# Altium PCB Compressor.PcbDoc (part 2 of 2)
Units mm, origin at the board's own origin, x right, y up, seen from the top; angles counter-clockwise.
Board outline 111 x 68.75 mm, 2 copper layers (Top Layer, Bottom Layer), stack 1.57 mm thick; 59 components, 13 nets, 218 pads, 0 vias.
Unrouted connection lines stored in the file: 54.
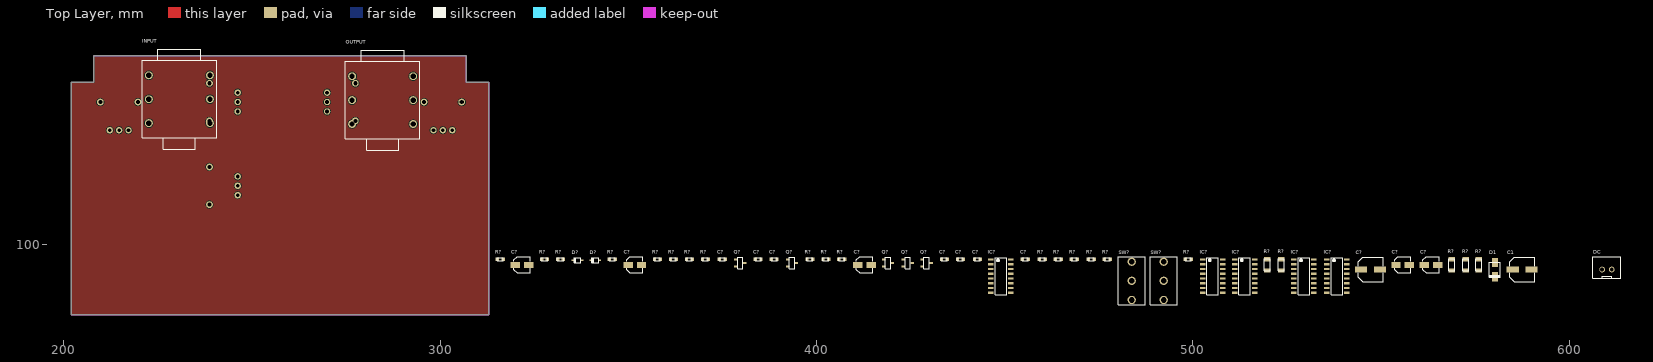
[diagram p0: Top Layer view]

## Part data (continued)
R?: library part CRCW06034M70FKEA, "RES SMD 4.7M OHM 1% 1/10W 0603", Case Code (Imperial)=0603, Case Code (Metric)=1608, Manufacturer=Vishay, Max Operating Temperature=155°C, Max Power Dissipation=100mW, Min Operating Temperature=-55°C, Package Quantity=10, Resistance=4.7MR, Supplier Part Number 1=2138688, Temperature Coefficient=100ppm/°C, Tolerance=1%, Voltage Rating=75V, Case/Package=0603, Category="Chip SMD Resistors", ComponentLink1Description=https://datasheet.ciiva.com/11812/0900766b80d98afc-11812356.pdf?src-supplier=RSComponents, ComponentLink1URL=https://datasheet.ciiva.com/11812/0900766b80d98afc-11812356.pdf?src-supplier=RSComponents, ComponentLink2Description=https://datasheet.ciiva.com/22706/1697337-22706246.pdf?src-supplier=Element14, ComponentLink2URL=https://datasheet.ciiva.com/22706/1697337-22706246.pdf?src-supplier=Element14, ComponentLink3Description=https://datasheet.ciiva.com/2465/dcrcwe3-2465837.pdf?src-supplier=Digi-Key, ComponentLink3URL=https://datasheet.ciiva.com/2465/dcrcwe3-2465837.pdf?src-supplier=Digi-Key, ComponentLink4Description=https://datasheet.ciiva.com/7843/1697337-7843309.pdf?src-supplier=Element14, ComponentLink4URL=https://datasheet.ciiva.com/7843/1697337-7843309.pdf?src-supplier=Element14, ComponentLink5Description=https://datasheet.ciiva.com/2465/dcrcwe3-2465838.pdf?src-supplier=Digi-Key, ComponentLink5URL=https://datasheet.ciiva.com/2465/dcrcwe3-2465838.pdf?src-supplier=Digi-Key, ComponentLink6Description=https://datasheet.ciiva.com/5546/dcrcwe3-109170-5546455.pdf?src-supplier=Mouser, ComponentLink6URL=https://datasheet.ciiva.com/5546/dcrcwe3-109170-5546455.pdf?src-supplier=Mouser, ComponentLink7Description=https://datasheet.ciiva.com/16494/dcrcwe3-16494471.pdf?src-supplier=Future+Electronics, ComponentLink7URL=https://datasheet.ciiva.com/16494/dcrcwe3-16494471.pdf?src-supplier=Future+Electronics, ComponentLink8Description=https://datasheet.ciiva.com/16884/dcrcwe3-16884663.pdf?src-supplier=Avnet+Europe, ComponentLink8URL=https://datasheet.ciiva.com/16884/dcrcwe3-16884663.pdf?src-supplier=Avnet+Europe, ComponentLink9Description=https://datasheet.ciiva.com/8337/dcrcwe3-8337323.pdf?src-supplier=Avnet, ComponentLink9URL=https://datasheet.ciiva.com/8337/dcrcwe3-8337323.pdf?src-supplier=Avnet, ComponentLink10Description=https://datasheet.ciiva.com/7843/1697337-7843308.pdf?src-supplier=Element14, ComponentLink10URL=https://datasheet.ciiva.com/7843/1697337-7843308.pdf?src-supplier=Element14, ComponentLink11Description=https://datasheet.ciiva.com/16768/70201119-16768908.pdf?src-supplier=Allied+Electronics, ComponentLink11URL=https://datasheet.ciiva.com/16768/70201119-16768908.pdf?src-supplier=Allied+Electronics, ComponentLink12Description=https://datasheet.ciiva.com/26314/fld-crcw-e3-data-en-26314621.pdf?src-supplier=Distrelec, ComponentLink12URL=https://datasheet.ciiva.com/26314/fld-crcw-e3-data-en-26314621.pdf?src-supplier=Distrelec, ComponentLink13Description=https://datasheet.ciiva.com/2465/dcrcwe3-2465839.pdf?src-supplier=Digi-Key, ComponentLink13URL=https://datasheet.ciiva.com/2465/dcrcwe3-2465839.pdf?src-supplier=Digi-Key, ComponentLink14Description=https://datasheet.ciiva.com/22871/70201119-22871247.pdf?src-supplier=Allied+Electronics, ComponentLink14URL=https://datasheet.ciiva.com/22871/70201119-22871247.pdf?src-supplier=Allied+Electronics, Composition="Thick Film", Contact Plating=Tin, Depth=0.85mm, Features="Automotive AEC-Q200", Height=0.45mm, Lead Free="Lead Free", Length=1.55mm, Manufacturer Part Number=CRCW06034M70FKEA, Military Standard=Not, Number of Pins=2, Number of Terminations=2, Packaging="Tape and Reel", Power Rating=100mW, Pricing="10=0.04580, 100=0.01840, 500=0.01280, 1000=0.00700, 2500=0.00580 (EUR)", Radiation Hardening=No, REACH SVHC=Unknown, RoHS=Yes, Stock=10515, Supplier 1=Farnell, Termination=SMD/SMT, Voltage Rating (DC)=75V, Weight=7.1E-05oz, Width=0.85mm
R?: library part CRCW060315K0FKEA, "RES SMD 15K OHM 1% 1/10W 0603", Case Code (Imperial)=0603, Case Code (Metric)=1608, Manufacturer=Vishay, Max Operating Temperature=155°C, Min Operating Temperature=-55°C, Package Quantity=5000, Power Rating=100mW, Resistance=15kR, Supplier Part Number 1=1469758, Temperature Coefficient=100ppm/°C, Tolerance=1%, Voltage Rating=75V, Case/Package=0603, Category="Chip SMD Resistors", ComponentLink1Description=https://datasheet.ciiva.com/11809/0900766b80d98afc-11809112.pdf?src-supplier=RSComponents, ComponentLink1URL=https://datasheet.ciiva.com/11809/0900766b80d98afc-11809112.pdf?src-supplier=RSComponents, ComponentLink2Description=https://datasheet.ciiva.com/26314/fld-crcw-e3-data-en-26314662.pdf?src-supplier=Distrelec, ComponentLink2URL=https://datasheet.ciiva.com/26314/fld-crcw-e3-data-en-26314662.pdf?src-supplier=Distrelec, ComponentLink3Description=https://datasheet.ciiva.com/7841/1697337-7841560.pdf?src-supplier=Element14, ComponentLink3URL=https://datasheet.ciiva.com/7841/1697337-7841560.pdf?src-supplier=Element14, ComponentLink4Description=https://datasheet.ciiva.com/15159/getdatasheetpartid-99315-15159946.pdf?src-supplier=Verical, ComponentLink4URL=https://datasheet.ciiva.com/15159/getdatasheetpartid-99315-15159946.pdf?src-supplier=Verical, ComponentLink5Description=https://datasheet.ciiva.com/16287/dcrcwe3-16287995.pdf?src-supplier=Future+Electronics, ComponentLink5URL=https://datasheet.ciiva.com/16287/dcrcwe3-16287995.pdf?src-supplier=Future+Electronics, ComponentLink6Description=https://datasheet.ciiva.com/16782/70201119-16782044.pdf?src-supplier=Allied+Electronics, ComponentLink6URL=https://datasheet.ciiva.com/16782/70201119-16782044.pdf?src-supplier=Allied+Electronics, ComponentLink7Description=https://datasheet.ciiva.com/7841/1697337-7841821.pdf?src-supplier=Element14, ComponentLink7URL=https://datasheet.ciiva.com/7841/1697337-7841821.pdf?src-supplier=Element14, ComponentLink8Description=https://datasheet.ciiva.com/16515/dcrcwe3-16515053.pdf?src-supplier=Avnet+Asia, ComponentLink8URL=https://datasheet.ciiva.com/16515/dcrcwe3-16515053.pdf?src-supplier=Avnet+Asia, ComponentLink9Description=https://datasheet.ciiva.com/16893/dcrcwe3-16893672.pdf?src-supplier=Avnet+Europe, ComponentLink9URL=https://datasheet.ciiva.com/16893/dcrcwe3-16893672.pdf?src-supplier=Avnet+Europe, Composition="Thick Film", Contact Plating=Tin, Depth=0.85mm, Height=0.45mm, Lead Free="Lead Free", Length=1.55mm, Manufacturer Part Number=CRCW060315K0FKEA, Military Standard=Not, Mount="Surface Mount", Packaging="Tape and Reel", Pricing="10=0.04600, 100=0.01830, 500=0.01570, 1000=0.00710, 2500=0.00550 (EUR)", Radiation Hardening=No, REACH SVHC=Unknown, RoHS=Yes, Stock=128466, Supplier 1=Farnell, Termination=SMD/SMT, Voltage Rating (DC)=75V, Weight=7.1E-05oz, Width=0.85mm
R?: library part CRCW120647R0FKEA, "RES SMD 47 OHM 1% 1/4W 1206", Case Code (Imperial)=1206, Case Code (Metric)=3216, Manufacturer=Vishay, Max Operating Temperature=155°C, Max Power Dissipation=250mW, Min Operating Temperature=-55°C, Package Quantity=10, Supplier Part Number 1=1470017, Temperature Coefficient=100ppm/°C, Tolerance=1%, Voltage Rating=200V, Case/Package=1206, ComponentLink1Description=https://datasheet.ciiva.com/11818/0900766b80d98b5e-11818252.pdf?src-supplier=RSComponents, ComponentLink1URL=https://datasheet.ciiva.com/11818/0900766b80d98b5e-11818252.pdf?src-supplier=RSComponents, ComponentLink2Description=https://datasheet.ciiva.com/2469/dcrcwe3-2469056.pdf?src-supplier=Digi-Key, ComponentLink2URL=https://datasheet.ciiva.com/2469/dcrcwe3-2469056.pdf?src-supplier=Digi-Key, ComponentLink3Description=https://datasheet.ciiva.com/16760/70201119-16760313.pdf?src-supplier=Allied+Electronics, ComponentLink3URL=https://datasheet.ciiva.com/16760/70201119-16760313.pdf?src-supplier=Allied+Electronics, ComponentLink4Description=https://datasheet.ciiva.com/9005/dcrcwe3-9005498.pdf?src-supplier=Avnet, ComponentLink4URL=https://datasheet.ciiva.com/9005/dcrcwe3-9005498.pdf?src-supplier=Avnet, ComponentLink5Description=https://datasheet.ciiva.com/2469/dcrcwe3-2469054.pdf?src-supplier=Digi-Key, ComponentLink5URL=https://datasheet.ciiva.com/2469/dcrcwe3-2469054.pdf?src-supplier=Digi-Key, ComponentLink6Description=https://datasheet.ciiva.com/9005/dcrcwe3-9005502.pdf?src-supplier=Avnet, ComponentLink6URL=https://datasheet.ciiva.com/9005/dcrcwe3-9005502.pdf?src-supplier=Avnet, ComponentLink7Description=https://datasheet.ciiva.com/16435/dcrcw-16435790.pdf?src-supplier=Future+Electronics, ComponentLink7URL=https://datasheet.ciiva.com/16435/dcrcw-16435790.pdf?src-supplier=Future+Electronics, ComponentLink8Description=https://datasheet.ciiva.com/16894/dcrcwe3-16894718.pdf?src-supplier=Avnet+Europe, ComponentLink8URL=https://datasheet.ciiva.com/16894/dcrcwe3-16894718.pdf?src-supplier=Avnet+Europe, ComponentLink9Description=https://datasheet.ciiva.com/7777/1697337-7777594.pdf?src-supplier=Element14, ComponentLink9URL=https://datasheet.ciiva.com/7777/1697337-7777594.pdf?src-supplier=Element14, ComponentLink10Description=https://datasheet.ciiva.com/15159/getdatasheetpartid-67741-15159676.pdf?src-supplier=Verical, ComponentLink10URL=https://datasheet.ciiva.com/15159/getdatasheetpartid-67741-15159676.pdf?src-supplier=Verical, ComponentLink11Description=https://datasheet.ciiva.com/2469/dcrcwe3-2469055.pdf?src-supplier=Digi-Key, ComponentLink11URL=https://datasheet.ciiva.com/2469/dcrcwe3-2469055.pdf?src-supplier=Digi-Key, Composition="Thick Film", Contact Plating=Tin, Depth=1.6mm, Features="Automotive AEC-Q200", Height=0.55mm, Lead Free="Lead Free", Length=3.2mm, Manufacturer Part Number=CRCW120647R0FKEA, Military Standard=Not, Mount="Surface Mount", Number of Terminations=2, Packaging="Tape and Reel", Power Rating=250mW, Price=0.0249, Pricing="10=0.0369, 100=0.0246, 500=0.0205, 1000=0.0135, 2500=0.0108 (EUR)", Radiation Hardening=No, REACH SVHC=Unknown, Resistance=47R, RoHS=Yes, Stock=90018, Supplier 1=Farnell, Termination=SMD/SMT, Voltage Rating (DC)=200V, Weight=0.000353oz, Width=0.063inch
R?: library part CRCW120627K0FKEA, "RES SMD 27K OHM 1% 1/4W 1206", Case Code (Imperial)=1206, Case Code (Metric)=3216, Manufacturer=Vishay, Max Operating Temperature=155°C, Max Power Dissipation=250mW, Min Operating Temperature=-55°C, Package Quantity=10, Resistance=27kR, Supplier Part Number 1=2139538, Temperature Coefficient=100ppm/°C, Tolerance=1%, Voltage Rating=200V, Case/Package=1206, Category="Chip SMD Resistors", ComponentLink1Description=https://datasheet.ciiva.com/11810/0900766b80d98b5e-11810475.pdf?src-supplier=RSComponents, ComponentLink1URL=https://datasheet.ciiva.com/11810/0900766b80d98b5e-11810475.pdf?src-supplier=RSComponents, ComponentLink2Description=https://datasheet.ciiva.com/2497/dcrcwe3-2497200.pdf?src-supplier=Digi-Key, ComponentLink2URL=https://datasheet.ciiva.com/2497/dcrcwe3-2497200.pdf?src-supplier=Digi-Key, ComponentLink3Description=https://datasheet.ciiva.com/7800/125364-7800678.pdf?src-supplier=Element14, ComponentLink3URL=https://datasheet.ciiva.com/7800/125364-7800678.pdf?src-supplier=Element14, ComponentLink4Description=https://datasheet.ciiva.com/16788/70201119-16788551.pdf?src-supplier=Allied+Electronics, ComponentLink4URL=https://datasheet.ciiva.com/16788/70201119-16788551.pdf?src-supplier=Allied+Electronics, ComponentLink5Description=https://datasheet.ciiva.com/16430/dcrcw-16430409.pdf?src-supplier=Future+Electronics, ComponentLink5URL=https://datasheet.ciiva.com/16430/dcrcw-16430409.pdf?src-supplier=Future+Electronics, ComponentLink6Description=https://datasheet.ciiva.com/16894/dcrcwe3-16894459.pdf?src-supplier=Avnet+Europe, ComponentLink6URL=https://datasheet.ciiva.com/16894/dcrcwe3-16894459.pdf?src-supplier=Avnet+Europe, ComponentLink7Description=https://datasheet.ciiva.com/2497/dcrcwe3-2497198.pdf?src-supplier=Digi-Key, ComponentLink7URL=https://datasheet.ciiva.com/2497/dcrcwe3-2497198.pdf?src-supplier=Digi-Key, ComponentLink8Description=https://datasheet.ciiva.com/22708/1697337-22708430.pdf?src-supplier=Element14, ComponentLink8URL=https://datasheet.ciiva.com/22708/1697337-22708430.pdf?src-supplier=Element14, ComponentLink9Description=https://datasheet.ciiva.com/2497/dcrcwe3-2497199.pdf?src-supplier=Digi-Key, ComponentLink9URL=https://datasheet.ciiva.com/2497/dcrcwe3-2497199.pdf?src-supplier=Digi-Key, ComponentLink10Description=https://datasheet.ciiva.com/7841/1697337-7841727.pdf?src-supplier=Element14, ComponentLink10URL=https://datasheet.ciiva.com/7841/1697337-7841727.pdf?src-supplier=Element14, Composition="Thick Film", Contact Plating=Tin, Depth=1.6mm, Features="Automotive AEC-Q200", Height=0.55mm, Lead Free="Lead Free", Length=3.2mm, Manufacturer Part Number=CRCW120627K0FKEA, Military Standard=Not, Number of Pins=2, Number of Terminations=2, Packaging="Tape and Reel", Power Rating=250mW, Pricing="10=0.10100, 100=0.03800, 500=0.02950, 1000=0.01190, 2500=0.01050 (EUR)", Radiation Hardening=No, REACH SVHC=Unknown, RoHS=Yes, Stock=4445, Supplier 1=Farnell, Termination=SMD/SMT, Voltage Rating (DC)=200V, Weight=0.000353oz, Width=0.063inch
R?: library part CRCW060339K0FKEA, "RES SMD 39K OHM 1% 1/10W 0603", Case Code (Imperial)=0603, Case Code (Metric)=1608, Manufacturer=Vishay, Max Operating Temperature=155°C, Max Power Dissipation=100mW, Min Operating Temperature=-55°C, Package Quantity=10, Resistance=39kR, Supplier Part Number 1=1469804, Temperature Coefficient=100ppm/°C, Tolerance=1%, Voltage Rating=75V, Case/Package=0603, ComponentLink1Description=https://datasheet.ciiva.com/11810/0900766b80d98afc-11810034.pdf?src-supplier=RSComponents, ComponentLink1URL=https://datasheet.ciiva.com/11810/0900766b80d98afc-11810034.pdf?src-supplier=RSComponents, ComponentLink2Description=https://datasheet.ciiva.com/16436/dcrcwe3-16436039.pdf?src-supplier=Future+Electronics, ComponentLink2URL=https://datasheet.ciiva.com/16436/dcrcwe3-16436039.pdf?src-supplier=Future+Electronics, ComponentLink3Description=https://datasheet.ciiva.com/2465/dcrcwe3-2465918.pdf?src-supplier=Digi-Key, ComponentLink3URL=https://datasheet.ciiva.com/2465/dcrcwe3-2465918.pdf?src-supplier=Digi-Key, ComponentLink4Description=https://datasheet.ciiva.com/3257/dcrcwe3-3257518.pdf?src-supplier=Avnet, ComponentLink4URL=https://datasheet.ciiva.com/3257/dcrcwe3-3257518.pdf?src-supplier=Avnet, ComponentLink5Description=https://datasheet.ciiva.com/2465/dcrcwe3-2465920.pdf?src-supplier=Digi-Key, ComponentLink5URL=https://datasheet.ciiva.com/2465/dcrcwe3-2465920.pdf?src-supplier=Digi-Key, ComponentLink6Description=https://datasheet.ciiva.com/7841/1697337-7841830.pdf?src-supplier=Element14, ComponentLink6URL=https://datasheet.ciiva.com/7841/1697337-7841830.pdf?src-supplier=Element14, ComponentLink7Description=https://datasheet.ciiva.com/16514/dcrcwe3-16514791.pdf?src-supplier=Avnet+Asia, ComponentLink7URL=https://datasheet.ciiva.com/16514/dcrcwe3-16514791.pdf?src-supplier=Avnet+Asia, ComponentLink8Description=https://datasheet.ciiva.com/16768/70201119-16768839.pdf?src-supplier=Allied+Electronics, ComponentLink8URL=https://datasheet.ciiva.com/16768/70201119-16768839.pdf?src-supplier=Allied+Electronics, ComponentLink9Description=https://datasheet.ciiva.com/7841/1697337-7841593.pdf?src-supplier=Element14, ComponentLink9URL=https://datasheet.ciiva.com/7841/1697337-7841593.pdf?src-supplier=Element14, ComponentLink10Description=https://datasheet.ciiva.com/3257/dcrcwe3-3257519.pdf?src-supplier=Avnet, ComponentLink10URL=https://datasheet.ciiva.com/3257/dcrcwe3-3257519.pdf?src-supplier=Avnet, ComponentLink11Description=https://datasheet.ciiva.com/26316/fld-crcw-e3-data-en-26316550.pdf?src-supplier=Distrelec, ComponentLink11URL=https://datasheet.ciiva.com/26316/fld-crcw-e3-data-en-26316550.pdf?src-supplier=Distrelec, ComponentLink12Description=https://datasheet.ciiva.com/2465/dcrcwe3-2465919.pdf?src-supplier=Digi-Key, ComponentLink12URL=https://datasheet.ciiva.com/2465/dcrcwe3-2465919.pdf?src-supplier=Digi-Key, ComponentLink13Description=https://datasheet.ciiva.com/5551/dcrcwe3-109170-5551951.pdf?src-supplier=Mouser, ComponentLink13URL=https://datasheet.ciiva.com/5551/dcrcwe3-109170-5551951.pdf?src-supplier=Mouser, Composition="Thick Film", Contact Plating=Tin, Depth=0.85mm, Features="Automotive AEC-Q200", Height=0.45mm, Lead Free="Lead Free", Length=1.55mm, Manufacturer Part Number=CRCW060339K0FKEA, Military Standard=Not, Mount="Surface Mount", Number of Pins=2, Number of Terminations=2, Packaging="Tape and Reel", Power Rating=100mW, Price=0.0093, Pricing="10=0.0112, 100=0.0092, 500=0.0084, 1000=0.0075 (EUR)", Radiation Hardening=No, REACH SVHC=Unknown, RoHS=Yes, Stock=76312, Supplier 1=Farnell, Termination=SMD/SMT, Voltage Rating (DC)=75V, Weight=7.1E-05oz, Width=0.033inch
R?: library part CRCW0603470KFKEA, "RES SMD 470K OHM 1% 1/10W 0603", Case Code (Imperial)=0603, Case Code (Metric)=1608, Manufacturer=Vishay, Max Operating Temperature=155°C, Max Power Dissipation=100mW, Min Operating Temperature=-55°C, Package Quantity=10, Resistance=470kR, Supplier Part Number 1=1469814, Temperature Coefficient=100ppm/°C, Tolerance=1%, Voltage Rating=75V, Case/Package=0603, Category="Chip SMD Resistors", ComponentLink1Description=https://datasheet.ciiva.com/11809/0900766b80d98afc-11809059.pdf?src-supplier=RSComponents, ComponentLink1URL=https://datasheet.ciiva.com/11809/0900766b80d98afc-11809059.pdf?src-supplier=RSComponents, ComponentLink2Description=https://datasheet.ciiva.com/2466/dcrcwe3-2466326.pdf?src-supplier=Digi-Key, ComponentLink2URL=https://datasheet.ciiva.com/2466/dcrcwe3-2466326.pdf?src-supplier=Digi-Key, ComponentLink3Description=https://datasheet.ciiva.com/2466/dcrcwe3-2466327.pdf?src-supplier=Digi-Key, ComponentLink3URL=https://datasheet.ciiva.com/2466/dcrcwe3-2466327.pdf?src-supplier=Digi-Key, ComponentLink4Description=https://datasheet.ciiva.com/2466/dcrcwe3-2466328.pdf?src-supplier=Digi-Key, ComponentLink4URL=https://datasheet.ciiva.com/2466/dcrcwe3-2466328.pdf?src-supplier=Digi-Key, ComponentLink5Description=https://datasheet.ciiva.com/5551/dcrcwe3-109170-5551097.pdf?src-supplier=Mouser, ComponentLink5URL=https://datasheet.ciiva.com/5551/dcrcwe3-109170-5551097.pdf?src-supplier=Mouser, ComponentLink6Description=https://datasheet.ciiva.com/16760/70201119-16760810.pdf?src-supplier=Allied+Electronics, ComponentLink6URL=https://datasheet.ciiva.com/16760/70201119-16760810.pdf?src-supplier=Allied+Electronics, ComponentLink7Description=https://datasheet.ciiva.com/7673/1720486-7673467.pdf?src-supplier=Element14, ComponentLink7URL=https://datasheet.ciiva.com/7673/1720486-7673467.pdf?src-supplier=Element14, ComponentLink8Description=https://datasheet.ciiva.com/7673/1697337-7673309.pdf?src-supplier=Element14, ComponentLink8URL=https://datasheet.ciiva.com/7673/1697337-7673309.pdf?src-supplier=Element14, ComponentLink9Description=https://datasheet.ciiva.com/26317/fld-crcw-e3-data-en-26317181.pdf?src-supplier=Distrelec, ComponentLink9URL=https://datasheet.ciiva.com/26317/fld-crcw-e3-data-en-26317181.pdf?src-supplier=Distrelec, ComponentLink10Description=https://datasheet.ciiva.com/16430/dcrcwe3-16430126.pdf?src-supplier=Future+Electronics, ComponentLink10URL=https://datasheet.ciiva.com/16430/dcrcwe3-16430126.pdf?src-supplier=Future+Electronics, Composition="Thick Film", Contact Plating=Tin, Depth=0.85mm, Features="Automotive AEC-Q200", Height=0.45mm, Lead Free="Lead Free", Length=1.55mm, Manufacturer Part Number=CRCW0603470KFKEA, Military Standard=Not, Mount="Surface Mount", Number of Pins=2, Number of Terminations=2, Packaging="Tape and Reel", Power Rating=100mW, Pricing="10=0.04580, 100=0.01840, 500=0.01580, 1000=0.00700, 2500=0.00610 (EUR)", Radiation Hardening=No, REACH SVHC=Unknown, RoHS=Yes, Stock=19203, Supplier 1=Farnell, Termination=SMD/SMT, Voltage Rating (DC)=75V, Weight=7.1E-05oz, Width=0.033inch
R?: library part CRCW120656K0FKEA, "RES SMD 56K OHM 1% 1/4W 1206", Case Code (Imperial)=1206, Case Code (Metric)=3216, Manufacturer=Vishay, Max Operating Temperature=155°C, Max Power Dissipation=250mW, Min Operating Temperature=-55°C, Package Quantity=10, Resistance=56kR, Supplier Part Number 1=2139568, Temperature Coefficient=100ppm/°C, Tolerance=1%, Voltage Rating=200V, Case/Package=1206, Category="Chip SMD Resistors", ComponentLink1Description=https://datasheet.ciiva.com/11811/0900766b80d98b5e-11811735.pdf?src-supplier=RSComponents, ComponentLink1URL=https://datasheet.ciiva.com/11811/0900766b80d98b5e-11811735.pdf?src-supplier=RSComponents, ComponentLink2Description=https://datasheet.ciiva.com/7841/1697337-7841765.pdf?src-supplier=Element14, ComponentLink2URL=https://datasheet.ciiva.com/7841/1697337-7841765.pdf?src-supplier=Element14, ComponentLink3Description=https://datasheet.ciiva.com/7841/1697337-7841766.pdf?src-supplier=Element14, ComponentLink3URL=https://datasheet.ciiva.com/7841/1697337-7841766.pdf?src-supplier=Element14, ComponentLink4Description=https://datasheet.ciiva.com/7800/125364-7800823.pdf?src-supplier=Element14, ComponentLink4URL=https://datasheet.ciiva.com/7800/125364-7800823.pdf?src-supplier=Element14, ComponentLink5Description=https://datasheet.ciiva.com/2469/dcrcwe3-2469003.pdf?src-supplier=Digi-Key, ComponentLink5URL=https://datasheet.ciiva.com/2469/dcrcwe3-2469003.pdf?src-supplier=Digi-Key, ComponentLink6Description=https://datasheet.ciiva.com/2469/dcrcwe3-2469004.pdf?src-supplier=Digi-Key, ComponentLink6URL=https://datasheet.ciiva.com/2469/dcrcwe3-2469004.pdf?src-supplier=Digi-Key, ComponentLink7Description=https://datasheet.ciiva.com/2469/dcrcwe3-2469005.pdf?src-supplier=Digi-Key, ComponentLink7URL=https://datasheet.ciiva.com/2469/dcrcwe3-2469005.pdf?src-supplier=Digi-Key, ComponentLink8Description=https://datasheet.ciiva.com/17176/dcrcwe3-17176445.pdf?src-supplier=Avnet+Europe, ComponentLink8URL=https://datasheet.ciiva.com/17176/dcrcwe3-17176445.pdf?src-supplier=Avnet+Europe, ComponentLink9Description=https://datasheet.ciiva.com/16507/dcrcwe3-16507430.pdf?src-supplier=Future+Electronics, ComponentLink9URL=https://datasheet.ciiva.com/16507/dcrcwe3-16507430.pdf?src-supplier=Future+Electronics, ComponentLink10Description=https://datasheet.ciiva.com/8999/dcrcwe3-8999063.pdf?src-supplier=Avnet, ComponentLink10URL=https://datasheet.ciiva.com/8999/dcrcwe3-8999063.pdf?src-supplier=Avnet, ComponentLink11Description=https://datasheet.ciiva.com/26316/fld-crcw-e3-data-en-26316471.pdf?src-supplier=Distrelec, ComponentLink11URL=https://datasheet.ciiva.com/26316/fld-crcw-e3-data-en-26316471.pdf?src-supplier=Distrelec, ComponentLink12Description=https://datasheet.ciiva.com/22704/1697337-22704459.pdf?src-supplier=Element14, ComponentLink12URL=https://datasheet.ciiva.com/22704/1697337-22704459.pdf?src-supplier=Element14, ComponentLink13Description=https://datasheet.ciiva.com/5542/dcrcwe3-109170-5542476.pdf?src-supplier=Mouser, ComponentLink13URL=https://datasheet.ciiva.com/5542/dcrcwe3-109170-5542476.pdf?src-supplier=Mouser, Composition="Thick Film", Contact Plating=Tin, Depth=1.6mm, Features="Automotive AEC-Q200", Height=0.55mm, Lead Free="Lead Free", Length=3.2mm, Manufacturer Part Number=CRCW120656K0FKEA, Military Standard=Not, Number of Pins=2, Number of Terminations=2, Packaging="Tape and Reel", Power Rating=250mW, Pricing="10=0.10100, 100=0.03800, 500=0.02950, 1000=0.01190, 2500=0.01050 (EUR)", Radiation Hardening=No, REACH SVHC=Unknown, RoHS=Yes, Stock=2799, Supplier 1=Farnell, Termination=SMD/SMT, Voltage Rating (DC)=200V, Weight=0.000353oz, Width=0.063inch
R? R?: library part CRCW06031K00FKEA, "RES SMD 1K OHM 1% 1/10W 0603", Case Code (Imperial)=0603, Case Code (Metric)=1608, Manufacturer="Vishay Dale", Max Operating Temperature=155°C, Max Power Dissipation=100mW, Min Operating Temperature=-55°C, Package Quantity=10, Resistance=1kR, Supplier Part Number 1=1469740, Temperature Coefficient=100ppm/°C, Tolerance=1%, Voltage Rating=75V, Case/Package=0603, ComponentLink1Description=https://datasheet.ciiva.com/11808/0900766b80d98afc-11808625.pdf?src-supplier=RSComponents, ComponentLink1URL=https://datasheet.ciiva.com/11808/0900766b80d98afc-11808625.pdf?src-supplier=RSComponents, ComponentLink2Description=https://datasheet.ciiva.com/2465/dcrcwe3-2465536.pdf?src-supplier=Digi-Key, ComponentLink2URL=https://datasheet.ciiva.com/2465/dcrcwe3-2465536.pdf?src-supplier=Digi-Key, ComponentLink3Description=https://datasheet.ciiva.com/8336/dcrcwe3-8336822.pdf?src-supplier=Avnet, ComponentLink3URL=https://datasheet.ciiva.com/8336/dcrcwe3-8336822.pdf?src-supplier=Avnet, ComponentLink4Description=https://datasheet.ciiva.com/16515/dcrcwe3-16515078.pdf?src-supplier=Avnet+Asia, ComponentLink4URL=https://datasheet.ciiva.com/16515/dcrcwe3-16515078.pdf?src-supplier=Avnet+Asia, ComponentLink5Description=https://datasheet.ciiva.com/46441/1720486-46441622.pdf?src-supplier=Element14, ComponentLink5URL=https://datasheet.ciiva.com/46441/1720486-46441622.pdf?src-supplier=Element14, ComponentLink6Description=https://datasheet.ciiva.com/26316/fld-crcw-e3-data-en-26316551.pdf?src-supplier=Distrelec, ComponentLink6URL=https://datasheet.ciiva.com/26316/fld-crcw-e3-data-en-26316551.pdf?src-supplier=Distrelec, ComponentLink7Description=https://datasheet.ciiva.com/46441/1720486-46441623.pdf?src-supplier=Element14, ComponentLink7URL=https://datasheet.ciiva.com/46441/1720486-46441623.pdf?src-supplier=Element14, ComponentLink8Description=https://datasheet.ciiva.com/46385/1697337-46385497.pdf?src-supplier=Element14, ComponentLink8URL=https://datasheet.ciiva.com/46385/1697337-46385497.pdf?src-supplier=Element14, ComponentLink9Description=https://datasheet.ciiva.com/3257/dcrcwe3-3257132.pdf?src-supplier=Avnet, ComponentLink9URL=https://datasheet.ciiva.com/3257/dcrcwe3-3257132.pdf?src-supplier=Avnet, ComponentLink10Description=https://datasheet.ciiva.com/16199/dcrcwe3-16199053.pdf?src-supplier=Future+Electronics, ComponentLink10URL=https://datasheet.ciiva.com/16199/dcrcwe3-16199053.pdf?src-supplier=Future+Electronics, ComponentLink11Description=https://datasheet.ciiva.com/2465/dcrcwe3-2465534.pdf?src-supplier=Digi-Key, ComponentLink11URL=https://datasheet.ciiva.com/2465/dcrcwe3-2465534.pdf?src-supplier=Digi-Key, ComponentLink12Description=https://datasheet.ciiva.com/16893/dcrcwe3-16893742.pdf?src-supplier=Avnet+Europe, ComponentLink12URL=https://datasheet.ciiva.com/16893/dcrcwe3-16893742.pdf?src-supplier=Avnet+Europe, ComponentLink13Description=https://datasheet.ciiva.com/2465/dcrcwe3-2465535.pdf?src-supplier=Digi-Key, ComponentLink13URL=https://datasheet.ciiva.com/2465/dcrcwe3-2465535.pdf?src-supplier=Digi-Key, Composition="Thick Film", Contact Plating=Tin, Depth=0.85mm, Features="Automotive AEC-Q200", Height=0.45mm, Lead Free="Lead Free", Length=1.55mm, Manufacturer Part Number=CRCW06031K00FKEA, Military Standard=Not, Mount="Surface Mount", Number of Pins=2, Number of Terminations=2, Packaging="Tape and Reel", Power Rating=100mW, Price=0.013, Pricing="10=0.017, 100=0.0131, 500=0.0114, 1000=0.008, 2500=0.0061 (EUR)", Radiation Hardening=No, REACH SVHC=Unknown, RoHS=Yes, Stock=1083345, Supplier 1=Farnell, Termination=SMD/SMT, Voltage Rating (DC)=75V, Weight=7.1E-05oz, Width=0.033inch
SW? SW?: library part SW_SPDT_ON-OFF-ON, "SPDT toggle switch ON/OFF/ON", Price=0.5

## Nets (pads, with @x,y where several pads share a name; then routed paths per layer and width w, separated by ;. In a path a pad name is that pad's centre, name@x,y a point inside that pad or via, vN(x,y) a via of type N, cw(c..) or ccw(c..) an arc to the next point about the centre after c; other vN are vias at no path point)
+9V: C1.+ D1.1 DC.1 R?.1@568.749,93.025
GND: C1.- C?.1@387.974,96 C?.-@323.521,94.5 C?.-@353.521,94.5 C?.-@549.77,93.25 C?.-@557.521,94.5 C?.-@565.021,94.5 D1.2 D?.2 DC.2 Q?.2@378.574,94.05 Q?.2@392.324,94.05 R?.1@326.974,96 R?.1@331.224,96 R?.1@344.974,96 R?.1@356.974,96 R?.1@361.224,96 R?.1@397.474,96 R?.1@519.749,93.025 R?.1@523.499,93.025
NetC?_1: C?.1@437.474,96 SW?.3@492.249,85.17
NetC?_2: C?.2@456.274,96 R?.2@399.024,96
NetC?_+: C?.+@349.977,94.5 Q?.1@423.074,95.95 Q?.3@380.924,95 Q?.3@394.674,95 R?.1@463.474,96 R?.1@476.474,96 SW?.3@483.749,85.17
NetC?_-: C?.-@414.521,94.5 Q?.2@428.074,94.05 R?.2@358.524,96
NetIC?_1: IC?.1@446.324,95.945 R?.1@315.224,96
NetQ?_3: Q?.3@420.174,95 R?.1@472.224,96
NetR?_1: R?.1@497.974,96 R?.2@465.024,96 SW?.2@483.749,90.25
NetR?_2: R?.2@478.024,96 SW?.1@483.749,95.33
Va1: C?.1@433.224,96 C?.+@553.977,94.5 R?.2@460.774,96 R?.2@469.274,96 R?.2@519.749,95.975 R?.2@572.499,95.975 SW?.2@492.249,90.25
Vb1: C?.+@561.477,94.5 R?.2@523.499,95.975 R?.2@575.999,95.975
Vr1: C?.+@544.728,93.25 Q?.3@425.424,95 Q?.3@430.424,95 R?.1@365.474,96 R?.1@572.499,93.025 R?.1@575.999,93.025 R?.2@473.774,96 R?.2@499.524,96 R?.2@568.749,95.975
pads on no net: 3. 3.1 3.2 3.3 4. 4.1 4.2 4.3 BLEND. BLEND.1 BLEND.2 BLEND.3 C?.1@374.224,96 C?.1@383.724,96 C?.1@441.974,96 C?.1@454.724,96 C?.2@375.774,96 C?.2@385.274,96 C?.2@389.524,96 C?.2@434.774,96 C?.2@439.024,96 C?.2@443.524,96 C?.+@319.978,94.5 C?.+@410.977,94.5 COMP. COMP.1 COMP.2 COMP.3 D?.1 IC?.1@502.574,95.945 IC?.1@511.074,95.945 IC?.1@526.824,95.945 IC?.1@535.574,95.945 IC?.2 IC?.3 IC?.4 IC?.5 IC?.6 IC?.7 IC?.8 IC?.9 IC?.10 IC?.11 IC?.12 IC?.13 IC?.14 IC?.15 IC?.16 INPUT.R INPUT.RN INPUT.S INPUT.SN INPUT.T INPUT.TN LEVEL. LEVEL.1 LEVEL.2 LEVEL.3 OUTPUT.R OUTPUT.RN OUTPUT.S OUTPUT.SN OUTPUT.T OUTPUT.TN Q?.1@378.574,95.95 Q?.1@392.324,95.95 Q?.1@417.824,95.95 Q?.1@428.074,95.95 Q?.2@417.824,94.05 Q?.2@423.074,94.05 R?.1@369.724,96 R?.1@401.724,96 R?.1@405.974,96 R?.1@459.224,96 R?.1@467.724,96 R?.2@316.774,96 R?.2@328.524,96 R?.2@332.774,96 R?.2@346.524,96 R?.2@362.774,96 R?.2@367.024,96 R?.2@371.274,96 R?.2@403.274,96 R?.2@407.524,96 SW?.1@492.249,95.33

## Polygon pours and split planes (outlines as drawn)
no net on Top Layer "NONET_L01_P000" (solid, pour order 0): 202,81.25 202,143 208,143 208,150 307,150 307,143 313,143 313,81.25
no net on Bottom Layer "NONET_L02_P001" (solid, pour order 1): 202,81.25 202,143 208,143 208,150 307,150 307,143 313,143 313,81.25

## Keep-outs
Keep-Out Layer:
  the board outline again, w0.1